# EAGLE board HL_Interface_pcb (EAGLE 9.5.2)
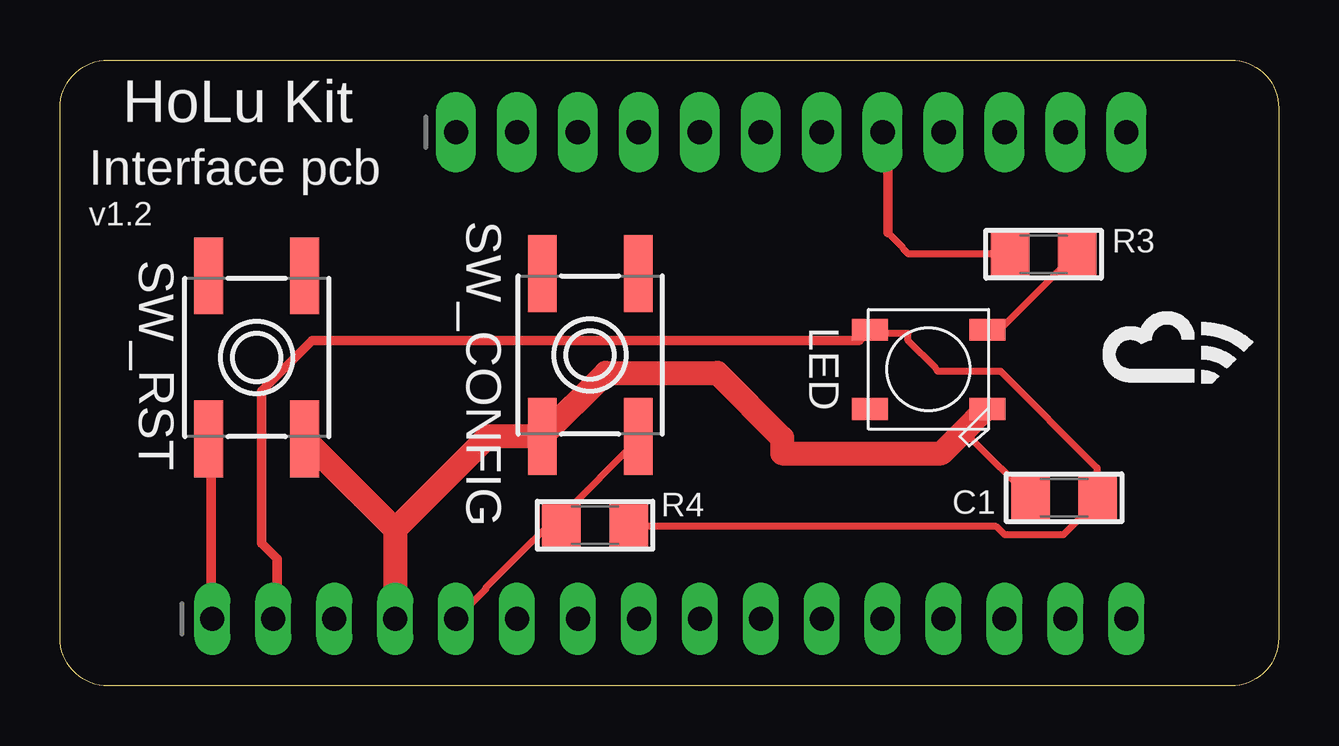
[diagram p0: board, top side]
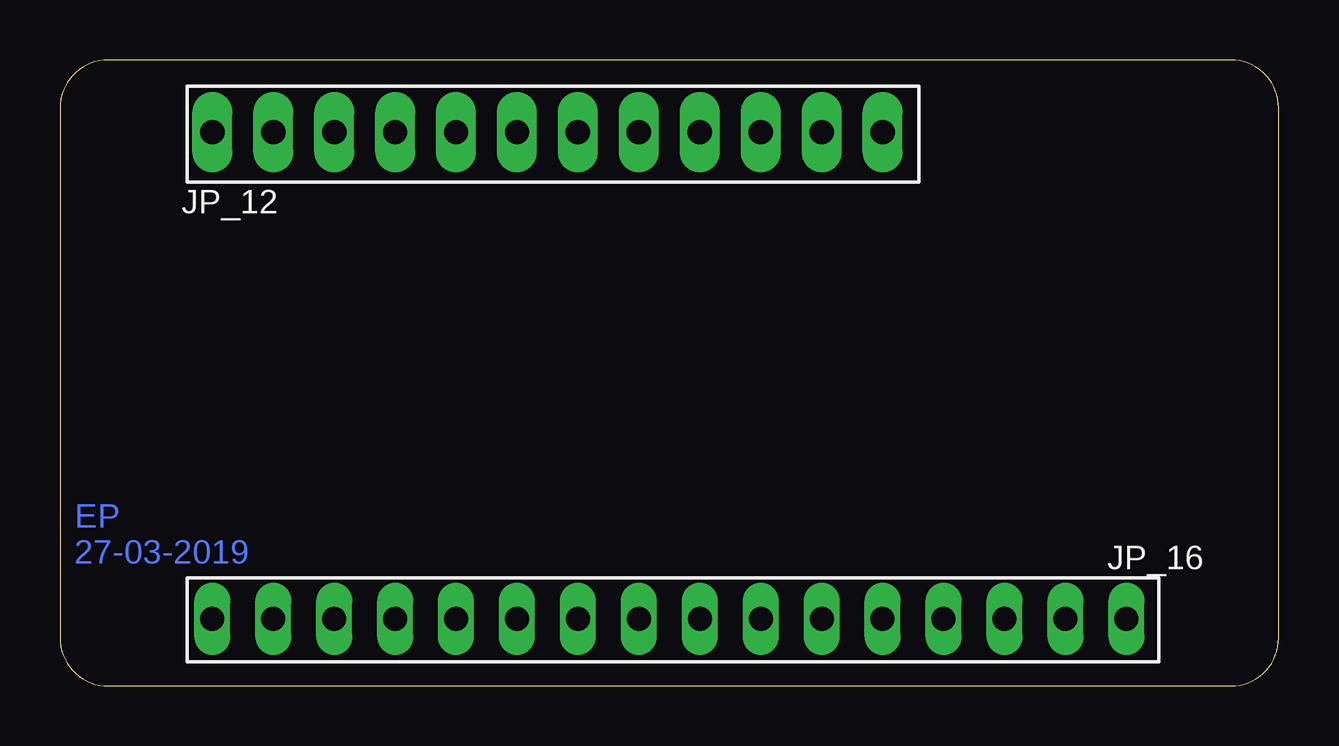
[diagram p1: board, bottom side, seen from below]

Size 50.8 x 26.1 mm. Coordinates in mm from the lower left corner, seen from the top.
Outline: 3.5,0 2,0 arc-90 0,2 0,3.8 0,24.1 arc-90 2,26.1 5.2,26.1 48.8,26.1 arc-90 50.8,24.1 50.8,23.3 50.8,2 arc-90 48.8,0 46.1,0 7.6,0 3.5,0
Copper layers (1*16): Top 0.035mm / dielectric 1.5mm / Bottom 0.035mm
Design rules "default *": minimum track width 6mil, minimum drill 0.35mm, track to track 0.4mm, track to pad 0.4mm, pad to pad 0.4mm, via to via 0.4mm, smd to smd 0.4mm, copper to edge 40mil, drill to drill 6mil, minimum pad ring 10mil, minimum via ring 8mil, stop-mask expansion 4mil, vias tented up to drill 0mil, thermal gap 10mil
Net classes: 0 default: width 0.3 mm, clearance 0.4 mm; 1 power: width 0.3 mm, clearance 0.4 mm; 2 power_5V: width 1 mm

## Footprints (pad centres in the part's own frame; a part is rotated, then mirrored left to right if it is on the bottom)
1206 = smd 1.6 x 1.8: 1 -1.4,0; 2 1.4,0
1X12_OVAL = drill 1.016 pad 1.676 long: 1 -13.97,0; 2 -11.43,0; 3 -8.89,0; 4 -6.35,0; 5 -3.81,0; 6 -1.27,0; 7 1.27,0; 8 3.81,0; 9 6.35,0; 10 8.89,0; 11 11.43,0; 12 13.97,0
1X16_OVAL = drill 1 long: 1 -19.05,0; 2 -16.51,0; 3 -13.97,0; 4 -11.43,0; 5 -8.89,0; 6 -6.35,0; 7 -3.81,0; 8 -1.27,0; 9 1.27,0; 10 3.81,0; 11 6.35,0; 12 8.89,0; 13 11.43,0; 14 13.97,0; 15 16.51,0; 16 19.05,0
WS2812B = smd 1.5 x 0.9: 1-VDD 2.45,-1.65; 2-DOUT 2.45,1.65; 3-GND -2.45,1.65; 4-DIN -2.45,-1.65
EVQ-Q2 = smd 3.2 x 1.2: A -3.4,-2; A' 3.4,-2; B -3.4,2; B' 3.4,2

## Placement (x,y rotation side)
C1  0.1u  [1206]  41.85,7.85 180 top
JP_12  [1X12_OVAL]  30.48,23.09 0 top
JP_16  [1X16_OVAL]  25.4,2.79 0 top
LED  WS2812B5050  [WS2812B]  36.2,13.2 180 top
R3  470  [1206]  41,18 0 top
R4  10K  [1206]  22.3,6.7 0 top
SW_CONFIG  [EVQ-Q2]  22.1,13.8 270 top
SW_RST  [EVQ-Q2]  8.2,13.7 90 top

## Library data of the parts
C1 R3 R4 SW_CONFIG SW_RST = microbuilder
JP_12 JP_16 = headers
LED = adafruit

## Nets
+3V3 [power]: C1.1 JP_16.2 LED.1-VDD R4.2
+5V [power_5V]: JP_12.3
CS: JP_12.7
GND [power]: C1.2 JP_16.4 LED.3-GND SW_CONFIG.A' SW_RST.A
LED_IN: JP_12.8 R3.1
N$1: JP_12.1
N$2: JP_12.2
N$3: LED.4-DIN R3.2
N$11: JP_16.3
N$13: JP_16.6
N$14: JP_16.7
N$17: JP_16.8
N$18: JP_16.9
N$19: JP_16.10
N$20: JP_16.11
N$21: JP_16.12
N$22: JP_16.13
N$23: JP_16.16
RX: JP_16.14
SCL: JP_12.11
SDA: JP_12.12
TX: JP_16.15
V_CONF: JP_16.5 R4.1 SW_CONFIG.B'
V_RST: JP_16.1 SW_RST.B

## Tracks (layer width: path | path; a pad name or v marks a point on that pad's centre or on a via)
+3V3
  Top 0.3: 33.6,14.7 35.35,14.7 35.35,14.4 36.5,13.25 36.58,13.12 39.2,13.12 43.23,9.1 43.23,7.88 C1.1 43.23,7.7 41.83,6.3 39.38,6.3 39.02,6.65 23.8,6.65 R4.2
  Top 0.4: JP_16.2 9,3 9,3.6 9.05,3.65 9.05,5.3 8.4,5.95 8.4,7.55 8.4,12.3 10.5,14.4 33.3,14.4 33.6,14.7 LED.1-VDD 33.9,14.7
GND
  Top 0.3: C1.2 40.42,7.88 37.98,10.32 37.67,10.63
  Top 0.4: 38.4,11.4 38.5,11.46 LED.3-GND | 20.1,10.5 SW_CONFIG.A' 20.1,10.5
  Top 1: SW_RST.A 13.97,6.53 | 13.97,6.53 JP_16.4 | 13.97,6.53 17.84,10.4 SW_CONFIG.A' 22.75,13.05 27.4,13.05 30.1,10.35 30.1,9.7 36.74,9.7 37.67,10.63 38.5,11.46
LED_IN
  Top 0.3: 34.5,18.9 35.13,18.27 35.17,18.2 35.35,18.02 39.55,18.02 R3.1
  Top 0.4: 34.5,18.9 34.5,22.8 JP_12.8
N$3
  Top 0.3: 39.1,14.92 38.72,14.92 LED.4-DIN 39.2,14.88 42.35,18.02 R3.2
  Top 0.4: 38.4,15 LED.4-DIN
V_CONF
  Top 0.3: 16.6,2.88 JP_16.5 17.75,4.03 17.75,4.09 18.98,5.32 20.57,6.91 | 20.57,6.91 20.86,7.2 | 20.57,6.91 20.65,6.83 20.82,6.83 R4.1 21,7.17 23.98,10.15 SW_CONFIG.B'
  Top 0.4: 24,10.2 SW_CONFIG.B'
V_RST
  Top 0.4: JP_16.1 6.3,3 6.3,10.2 SW_RST.B

## Text on the board
Bottom: EP / 27-03-2019
tPlace: HoLu Kit | Interface pcb | v1.2
tDocu: Designed by Stichting Waag Society / / Released under the Creative Commons Attribution Share-Alike 4.0 Licence / https://creativecommons.org/licenses/by-sa/4.0/